# Altium PCB can_transceiver.PcbDoc
Units mil, origin at the board's own origin, x right, y up, seen from the top; angles counter-clockwise.
Board outline 6000 x 4000 mil, 2 copper layers (Top Layer, Bottom Layer); 11 components, 14 nets, 49 pads, 2 vias.
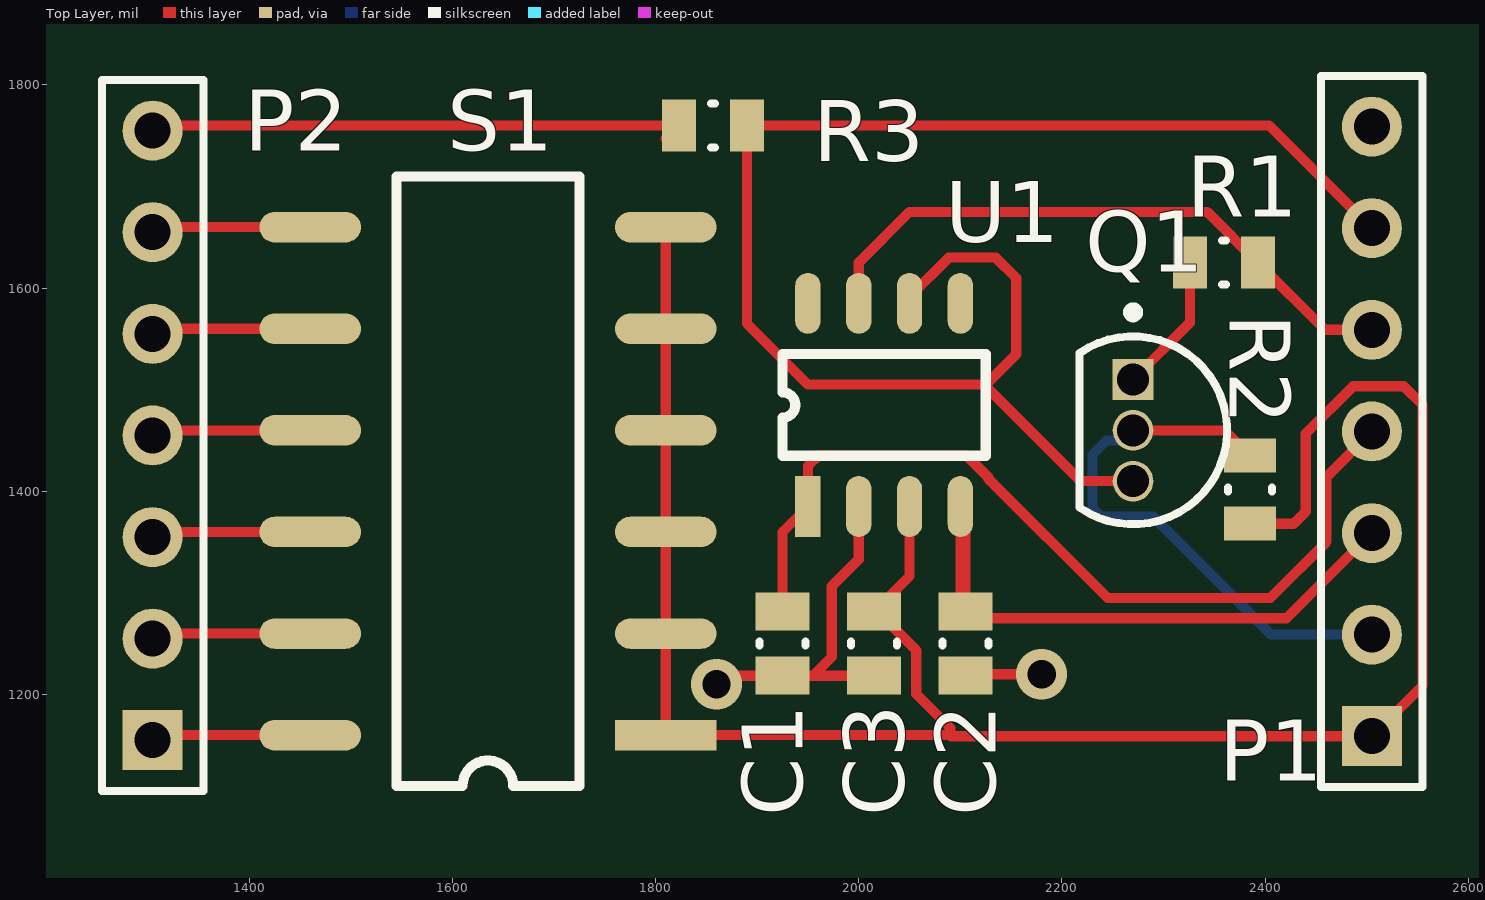
[diagram p0: Top Layer view]
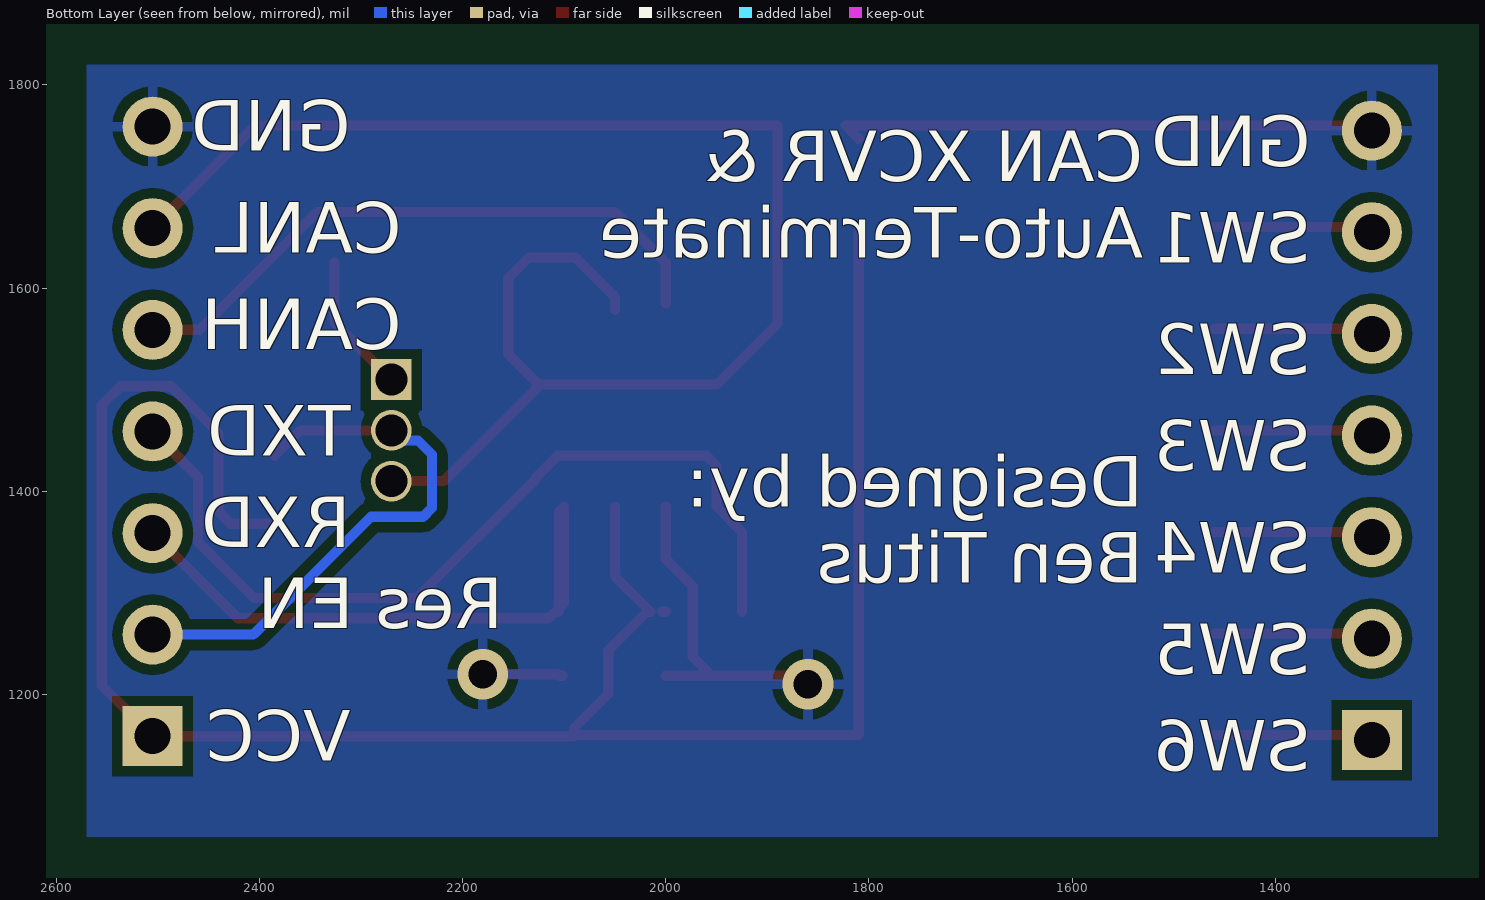
[diagram p1: Bottom Layer view, seen from below]

## Layer stack, top to bottom
Top Solder: solder mask 0.4, Solder Resist, Dk 3.5
Top Layer: signal copper 1.4
Dielectric 1: dielectric 12.6, FR-4, Dk 4.8
Bottom Layer: signal copper 1.4
Bottom Solder: solder mask 0.4, Solder Resist, Dk 3.5

## Board outline
1000,1000 7000,1000 7000,5000 1000,5000

## Design rules (kind name [scope] priority, off if disabled: settings)
Clearance [All] p1: gap=10 ignorepadtopadclearanceinfootprint=FALSE except(0: Arc-Hole Track-Hole SMDPad-Hole THPad-Hole Via-Hole Fill-Hole Poly-Hole Region-Hole Text-Hole)
PolygonConnect [All] p1: connectstyle=Relief reliefconductorwidth=10 reliefentries=4 polygonreliefangle="90 Angle" airgapwidth=10
RoomDefinition can_transceiver [InComponentClass('can_transceiver')] p1: confinementstyle=ConfineIn formatcopy=TRUE lockcomponents=FALSE outline 1230,1055 2570,1055 2570,1825 1230,1825
RoutingVias [All] p1: holewidth=28 width=50 viastyle="Through Hole" minholewidth=28 minwidth=50 maxholewidth=28 maxwidth=50
SolderMaskExpansion [All] p1: expansion=4
Width [All] p1: maxlimit=10 minlimit=10 preferedwidth=10
30 further rules are at their usual default settings.

## Components (designator, comment, footprint, x,y, rotation, side; value= is the part's Value field where it differs from the comment)
C1 "47pF" CAPC0805(2012)145_L 1925,1250 r90 top
C2 "47pF" CAPC0805(2012)145_L 2105,1250 r90 top
C3 "0.1uF" CAPC0805(2012)145_L 2015,1250 r90 top
P1 "Header 7" HDR1X7 2505,1158.94 r90 top
P2 "Header 7" HDR1X7 1305,1155 r90 top
Q1 "BS170" ONSC-TO-92-3-29-11 2270,1460 r270 top
R1 "115" RESC0805(2012)_L 2359.41,1625 r0 top
R2 "1k" RESC0805(2012)_L 2385,1401.54 r270 top
R3 "100k" RESC0805(2012)_L 1856.54,1760 r0 top
S1 "DIP_Switch_6" SOP12 1810,1160 r180 top
U1 "TCAN332" SOP8 1950,1385 r90 top

## Footprints (in the part's own frame and the unit in brackets; to place one, negate y for a bottom-side part, rotate by r counter-clockwise, add the part's x,y. Pads: shape width x height; smd on the part's side, far side on the other; paste and mask are expansions set on the pad)
CAPC0805(2012)145_L [mm]
  rect 0.95x1.35 smd: 1(-0.8,0) 2(0.8,0)
  silkscreen extent -0.05,-0.58 0.05,0.58, body extent -1.1,-0.72 1.1,0.72, height 1.45
HDR1X7 [mm] "Connector; Header; 7 Position"
  rect 1.5x1.5 hole 0.9: 1(0,0)
  round 1.5 hole 0.9: 2(2.54,0) 3(5.08,0) 4(7.62,0) 5(10.16,0) 6(12.7,0) 7(15.24,0)
  silkscreen extent -1.27,-1.27 16.51,1.27
ONSC-TO-92-3-29-11 [mil] "TO, 3-Leads, Body Dia 4.7mm, Pitch 1.27mm"
  rect 40x40 hole 31.5: 1(-50,0)
  round 40 hole 31.5: 2(0,0) 3(50,0)
  silkscreen extent -121,-53 92,92, body extent -92,-53 93,93, height 310
RESC0805(2012)_L [mm]
  rect 0.85x1.3 smd: 1(-0.85,0) 2(0.85,0)
  silkscreen extent -0.05,-0.55 0.05,0.55, body extent -1.1,-0.67 1.1,0.68, height 0.7
SOP8 [mil]
  rect 60x25 smd: 1(0,0)
  oval 60x25 smd: 2(0,-50) 3(0,-100) 4(0,-150) 5(200,-150) 6(200,-100) 7(200,-50) 8(200,0)
  silkscreen extent 50,-175 150,25
SOP12 [mil]
  rect 100x30 smd: 1(0,0)
  oval 100x30 smd: 2(0,-100) 3(0,-200) 4(0,-300) 5(0,-400) 6(0,-500) 7(350,-500) 8(350,-400) 9(350,-300) 10(350,-200) 11(350,-100) 12(350,0)
  silkscreen extent 85,-550 265,50

## Part data
C1 C2 C3: library part CMP-1590-00003-1, "0805 (2012 Metric) Chip Capacitor", Case-EIA=0805, Case-Metric=2012, PackageReference=CAPC0805(2012)145
P1 P2: "Header, 7-Pin", LatestRevisionDate=17-Jul-2002, LatestRevisionNote="Re-released for DXP Platform.", Publisher="Altium Limited"
Q1: "Small Signal MOSFET, 500 mA, 60 V, N-Channel, 3-Pin TO-92, Bulk Box", Manufacturer="On Semiconductor", Package Type=TO-92, Supplier Part Number 1=BS170OS-ND, Channel Polarity="N Channel", ComponentLink1Description="Manufacturer URL", ComponentLink1URL=http://www.onsemi.com/, ComponentLink2Description=Datasheet, ComponentLink2URL=http://www.onsemi.com/pub_link/Collateral/BS170-D.PDF, ComponentLink3Description="Package Specification", ComponentLink3URL=http://www.onsemi.cn/pub_link/Collateral/2N6426-D.PDF, Configuration=Single, DatasheetVersion="Rev. 6", ID Max (A)=0.5, Mounting Technology="Through Hole", PackageDescription="3-Pin Transistor Outline, Body 4.825 x 3.685 mm, Pitch 1.27 mm", PackageReference=TO-92-3-29-11_AM_SL, PackageVersion="Rev. AM", Packing="Bulk Box", PartNumber=BS170, PD Max (W)=0.35, Supplier 1=Digi-Key, V(BR)DSS Min (V)=60, VGS(th) Max (V)=3, VGS Max (V)=20
R1 R2 R3: library part CMP-1591-00002-1, "0805 (2012 Metric) Chip Resistor", Case-EIA=0805, Case-Metric=2012, PackageReference=RESC0805(2012)
S1: "6 pin DIP switch"
U1: "3.3V CAN Transceiver"

## Via types
v1: diameter 50, hole 28, Top Layer to Bottom Layer, 2 vias

## Nets (pads, with @x,y where several pads share a name; then routed paths per layer and width w, separated by ;. In a path a pad name is that pad's centre, name@x,y a point inside that pad or via, vN(x,y) a via of type N, cw(c..) or ccw(c..) an arc to the next point about the centre after c; other vN are vias at no path point)
CANH: P1.5 R1.2 U1.7 | length 613.8
  Top Layer w10: U1.7 2000,1625 2050,1675 2342.87,1675 R1.2 2458.94,1558.94 P1.5
CANL: P1.6 Q1.3 R3.2 U1.6 | length 1556.9
  Top Layer w10: U1.6@2050,1578.61 U1.6 2050,1591.39 2088.61,1630 2135,1630 2155,1610 2155,1535 2125,1505 2123.61,1505 ; Q1.3 2218.61,1410 2123.61,1505 ; P1.6 2403.94,1760 R3.2 1890,1565 1950,1505 2123.61,1505
GND: C1.1 C2.1 C3.1 P1.7 P2.7 R3.1 U1.2 | length 946.4
  Top Layer w10: P2.7 1310,1760 R3.1 R3.1@1810,1746.93 ; v1(1860,1210) 1868.5,1218.5 C1.1 1955,1218.5 ; C3.1@2000,1218.5 1955,1218.5 ; U1.2 2000,1332.98 1973.43,1306.41 1973.43,1236.93 1955,1218.5 ; C2.1@2101.5,1218.5 C2.1 2106.5,1220 v1(2180,1220)
NetP1_2: P1.2 Q1.2 R2.1 | length 560.2
  Top Layer w10: Q1.2@2265,1460 2360,1460 R2.1
  Bottom Layer w10: Q1.2@2265,1460 2265,1450 2243.79,1450 2230,1436.21 2230,1383.79 2238.79,1375 2290,1375 2406.06,1258.94 P1.2
NetP2_1: P2.1 S1.12 | length 157.1
  Top Layer w10: P2.1 1310,1160 S1.12
NetP2_2: P2.2 S1.11 | length 157.1
  Top Layer w10: P2.2 1310,1260 S1.11
NetP2_3: P2.3 S1.10 | length 157.1
  Top Layer w10: P2.3 1310,1360 S1.10
NetP2_4: P2.4 S1.9 | length 157.1
  Top Layer w10: P2.4 1310,1460 S1.9
NetP2_5: P2.5 S1.8 | length 157.1
  Top Layer w10: P2.5 1310,1560 S1.8
NetP2_6: P2.6 S1.7 | length 157.1
  Top Layer w10: P2.6 1310,1660 S1.7
NetQ1_1: Q1.1 R1.1 | length 138.2
  Top Layer w10: Q1.1 2325.95,1565.94 R1.1
RXD: C2.2 P1.3 U1.4 | length 646.6
  Top Layer w10: C2.2 C2.2@2105,1285 ; P1.3 2421.06,1275 2115,1275 C2.2@2105,1285 ; C2.2@2105,1285 2105,1380 U1.4 2100,1290 C2.2@2105,1285
TXD: C1.2 P1.4 U1.1 | length 877.2
  Top Layer w10: C1.2 1925,1360 U1.1 1950,1425 1960,1435 2106.39,1435 2127.5,1413.89 2127.5,1412.5 2245,1295 2405,1295 2460.47,1350.47 2460.47,1414.41 P1.4
VCC: C3.2 P1.1 R2.2 S1.1 S1.2 S1.3 S1.4 S1.5 S1.6 U1.3 | length 2097.1
  Top Layer w10: S1.6 S1.5 S1.4 S1.3 S1.2 S1.1 2090,1160 ; C3.2@2000,1281.5 C3.2@2003.5,1281.5 ; U1.3 2050,1316.5 C3.2 2018.5,1281.5 2056.57,1243.42 2056.57,1200.44 2090,1167.02 2090,1160 ; R2.2 2428.07,1368.07 2440,1380 2440,1456.91 2486.56,1503.46 2536.54,1503.46 2555,1485 2555,1208.94 P1.1 2091.06,1158.94 2090,1160
pads on no net: U1.5 U1.8

## Polygon pours and split planes (outlines as drawn)
GND on Bottom Layer "GND_L02_P000" (solid, pour order 0): 1240,1060 2570,1060 2570,1820 1240,1820

## Silkscreen, mask and mechanical layers (free items; w line width, h text height)
Bottom Overlay:
  text "GND" at 2310,1735 h50
  text "GND" at 1365,1720 h50
  text "CANL" at 2260,1635 h50
  text "CAN XCVR & / Auto-Terminate" at 1530,1630 h50
  text "SW1" at 1365,1625 h50
  text "CANH" at 2260,1540 h50
  text "SW2" at 1365,1515 h50
  text "TXD" at 2310,1435 h50
  text "SW3" at 1365,1420 h50
  text "RXD" at 2310,1345 h50
  text "SW4" at 1365,1320 h50
  text "Designed by: / Ben Titus" at 1530,1310 h50
  text "Res EN" at 2160,1265 h50
  text "SW5" at 1365,1220 h50
  text "VCC" at 2310,1135 h50
  text "SW6" at 1365,1125 h50
Drill Drawing:
  lines w10: 1240,1060 1240,1820 2570,1820 2570,1060 1240,1060